# Altium PCB Main.PcbDoc (part 1 of 2)
Units mil, origin at the board's own origin, x right, y up, seen from the top; angles counter-clockwise.
Board outline 5500 x 3500 mil, 4 copper layers (Top Layer, Gnd 1, Interconnects, Gnd 2), stack 64.6 mil thick; 166 components, 135 nets, 540 pads, 1158 vias.
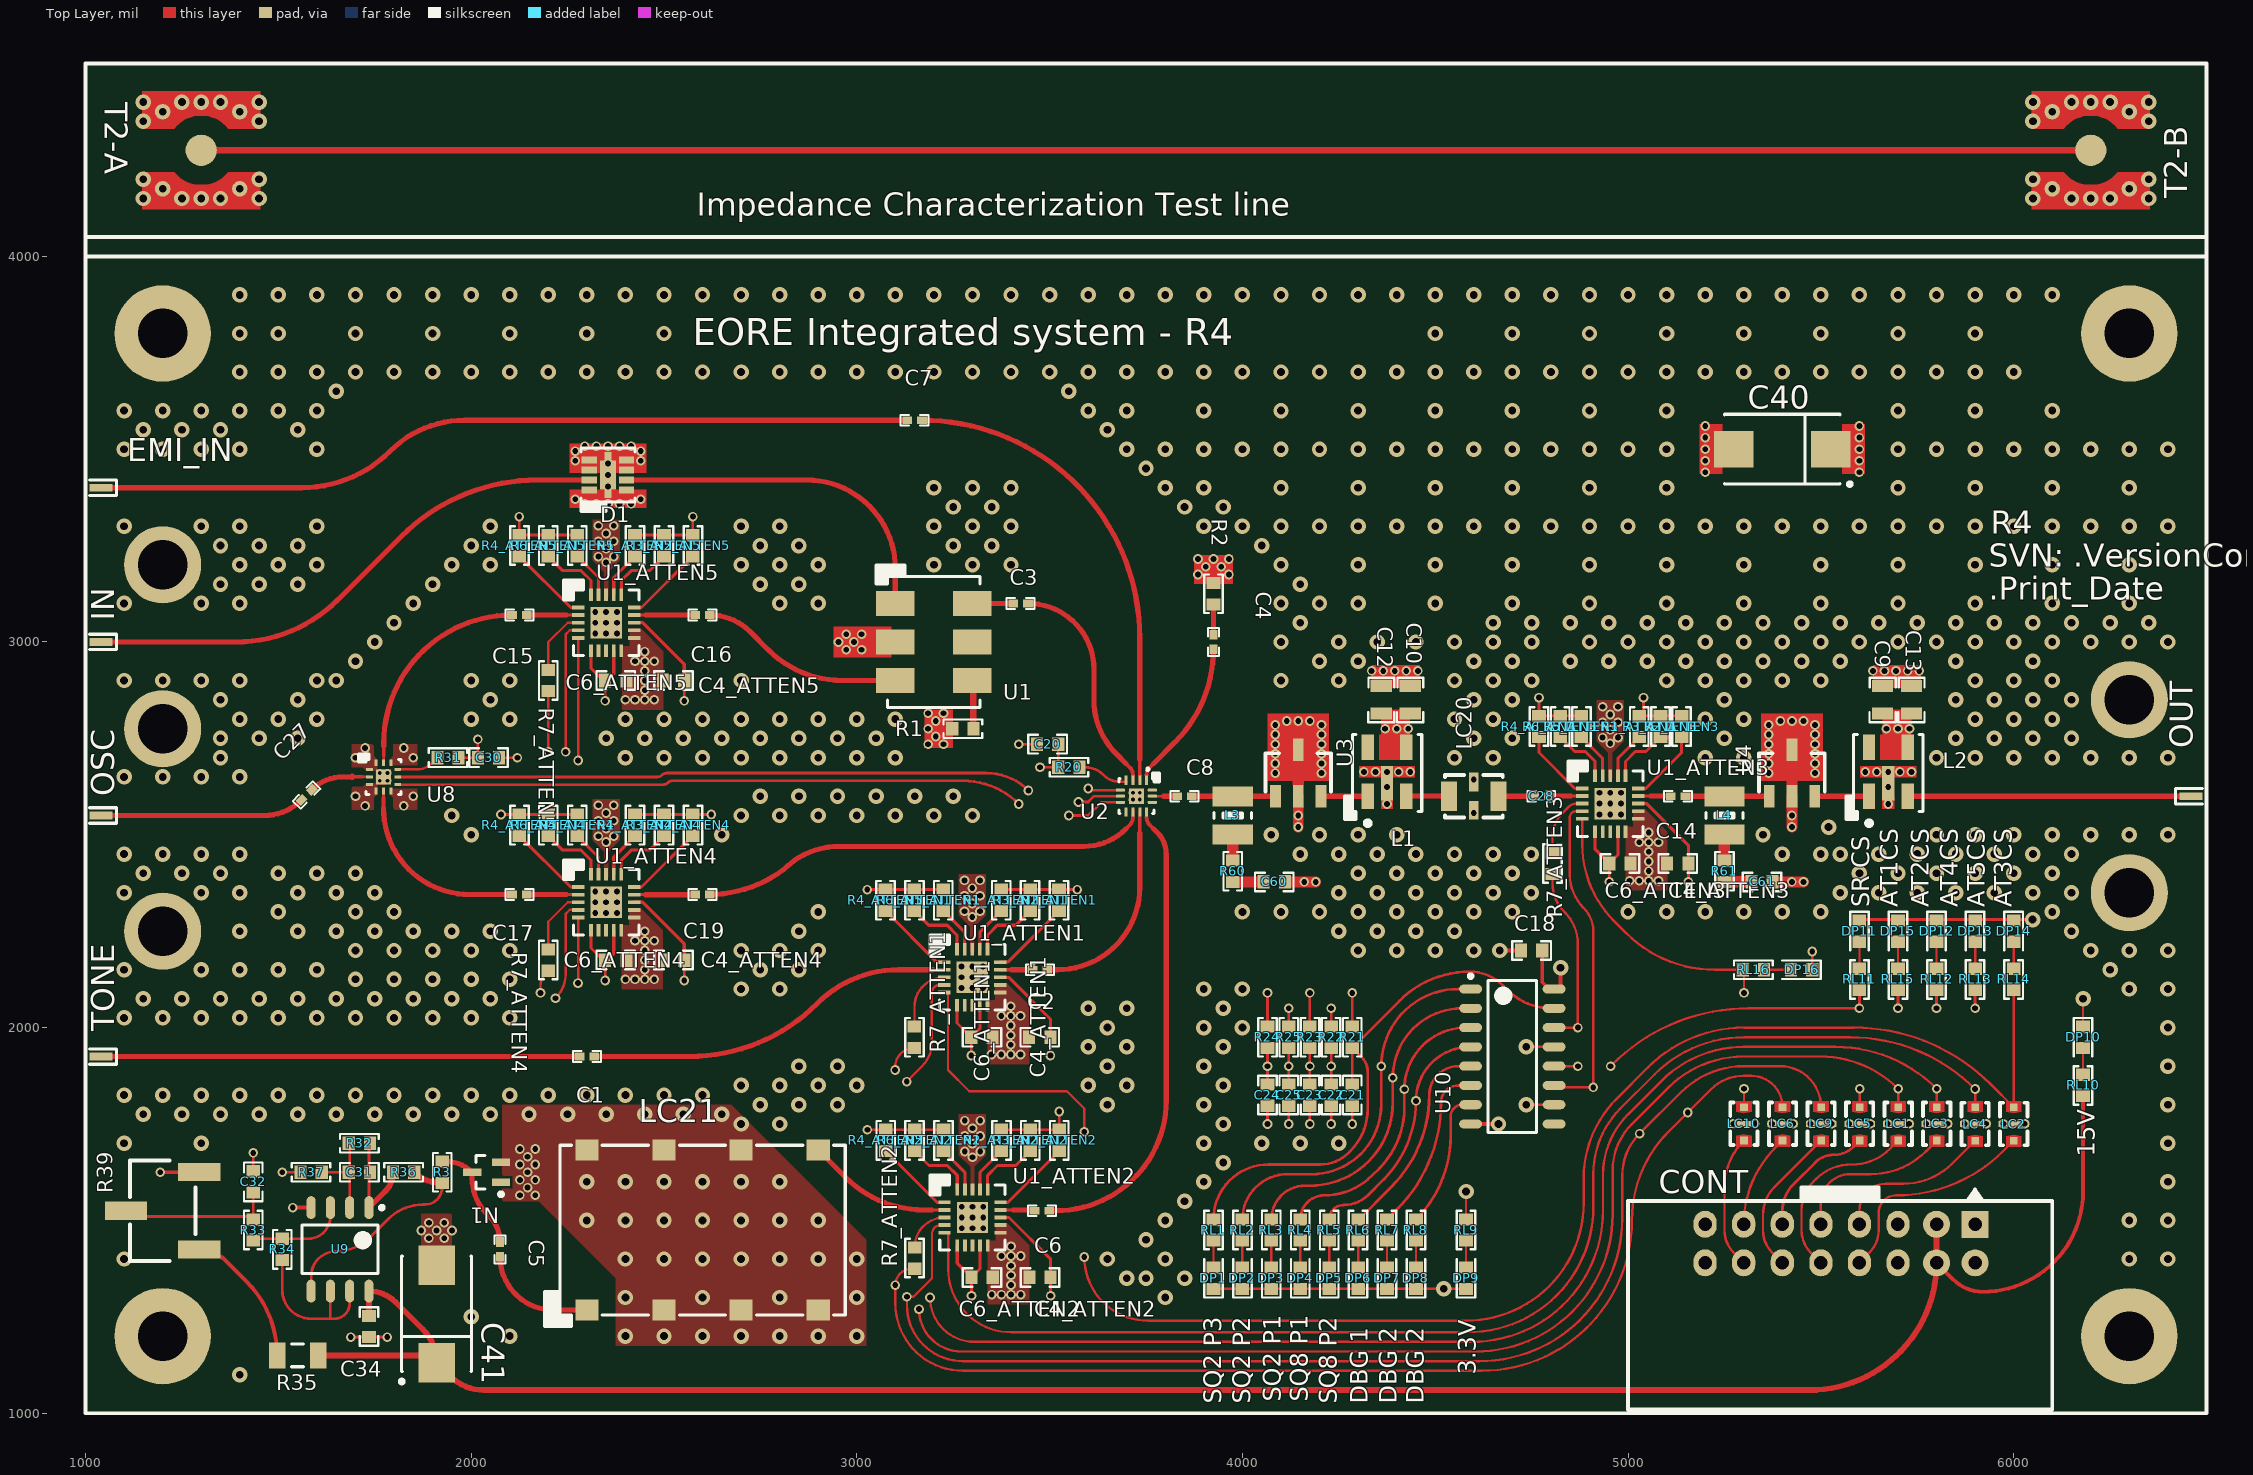
[diagram p0: Top Layer view]
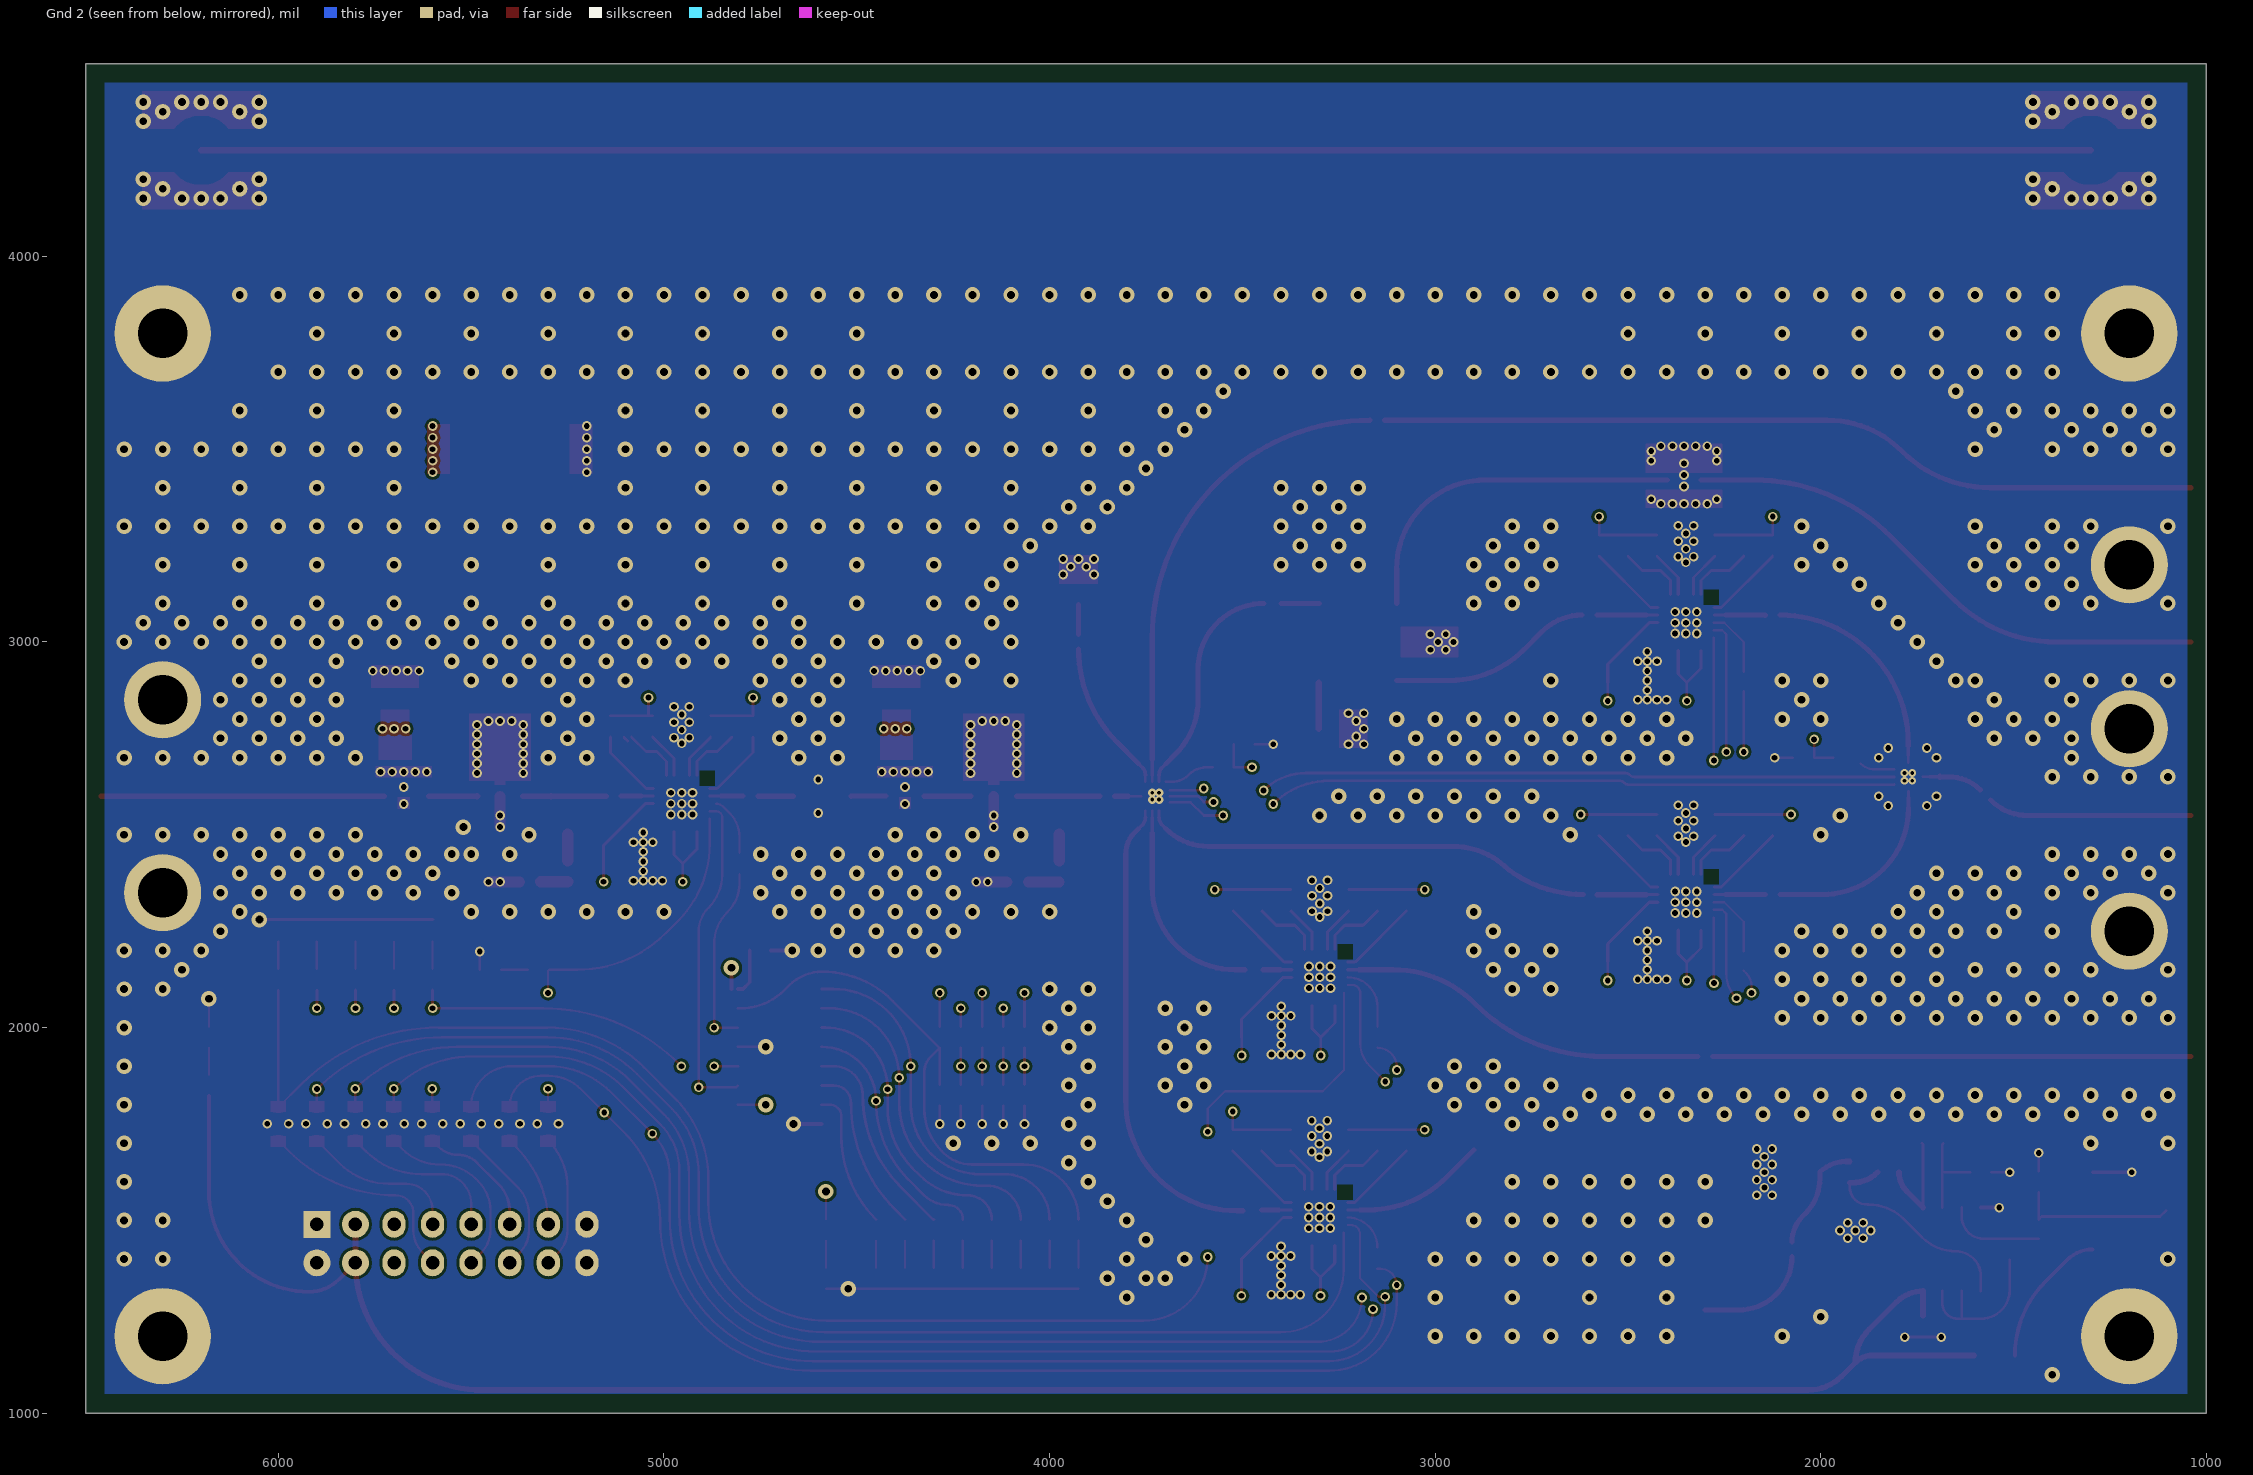
[diagram p1: Gnd 2 view, seen from below]
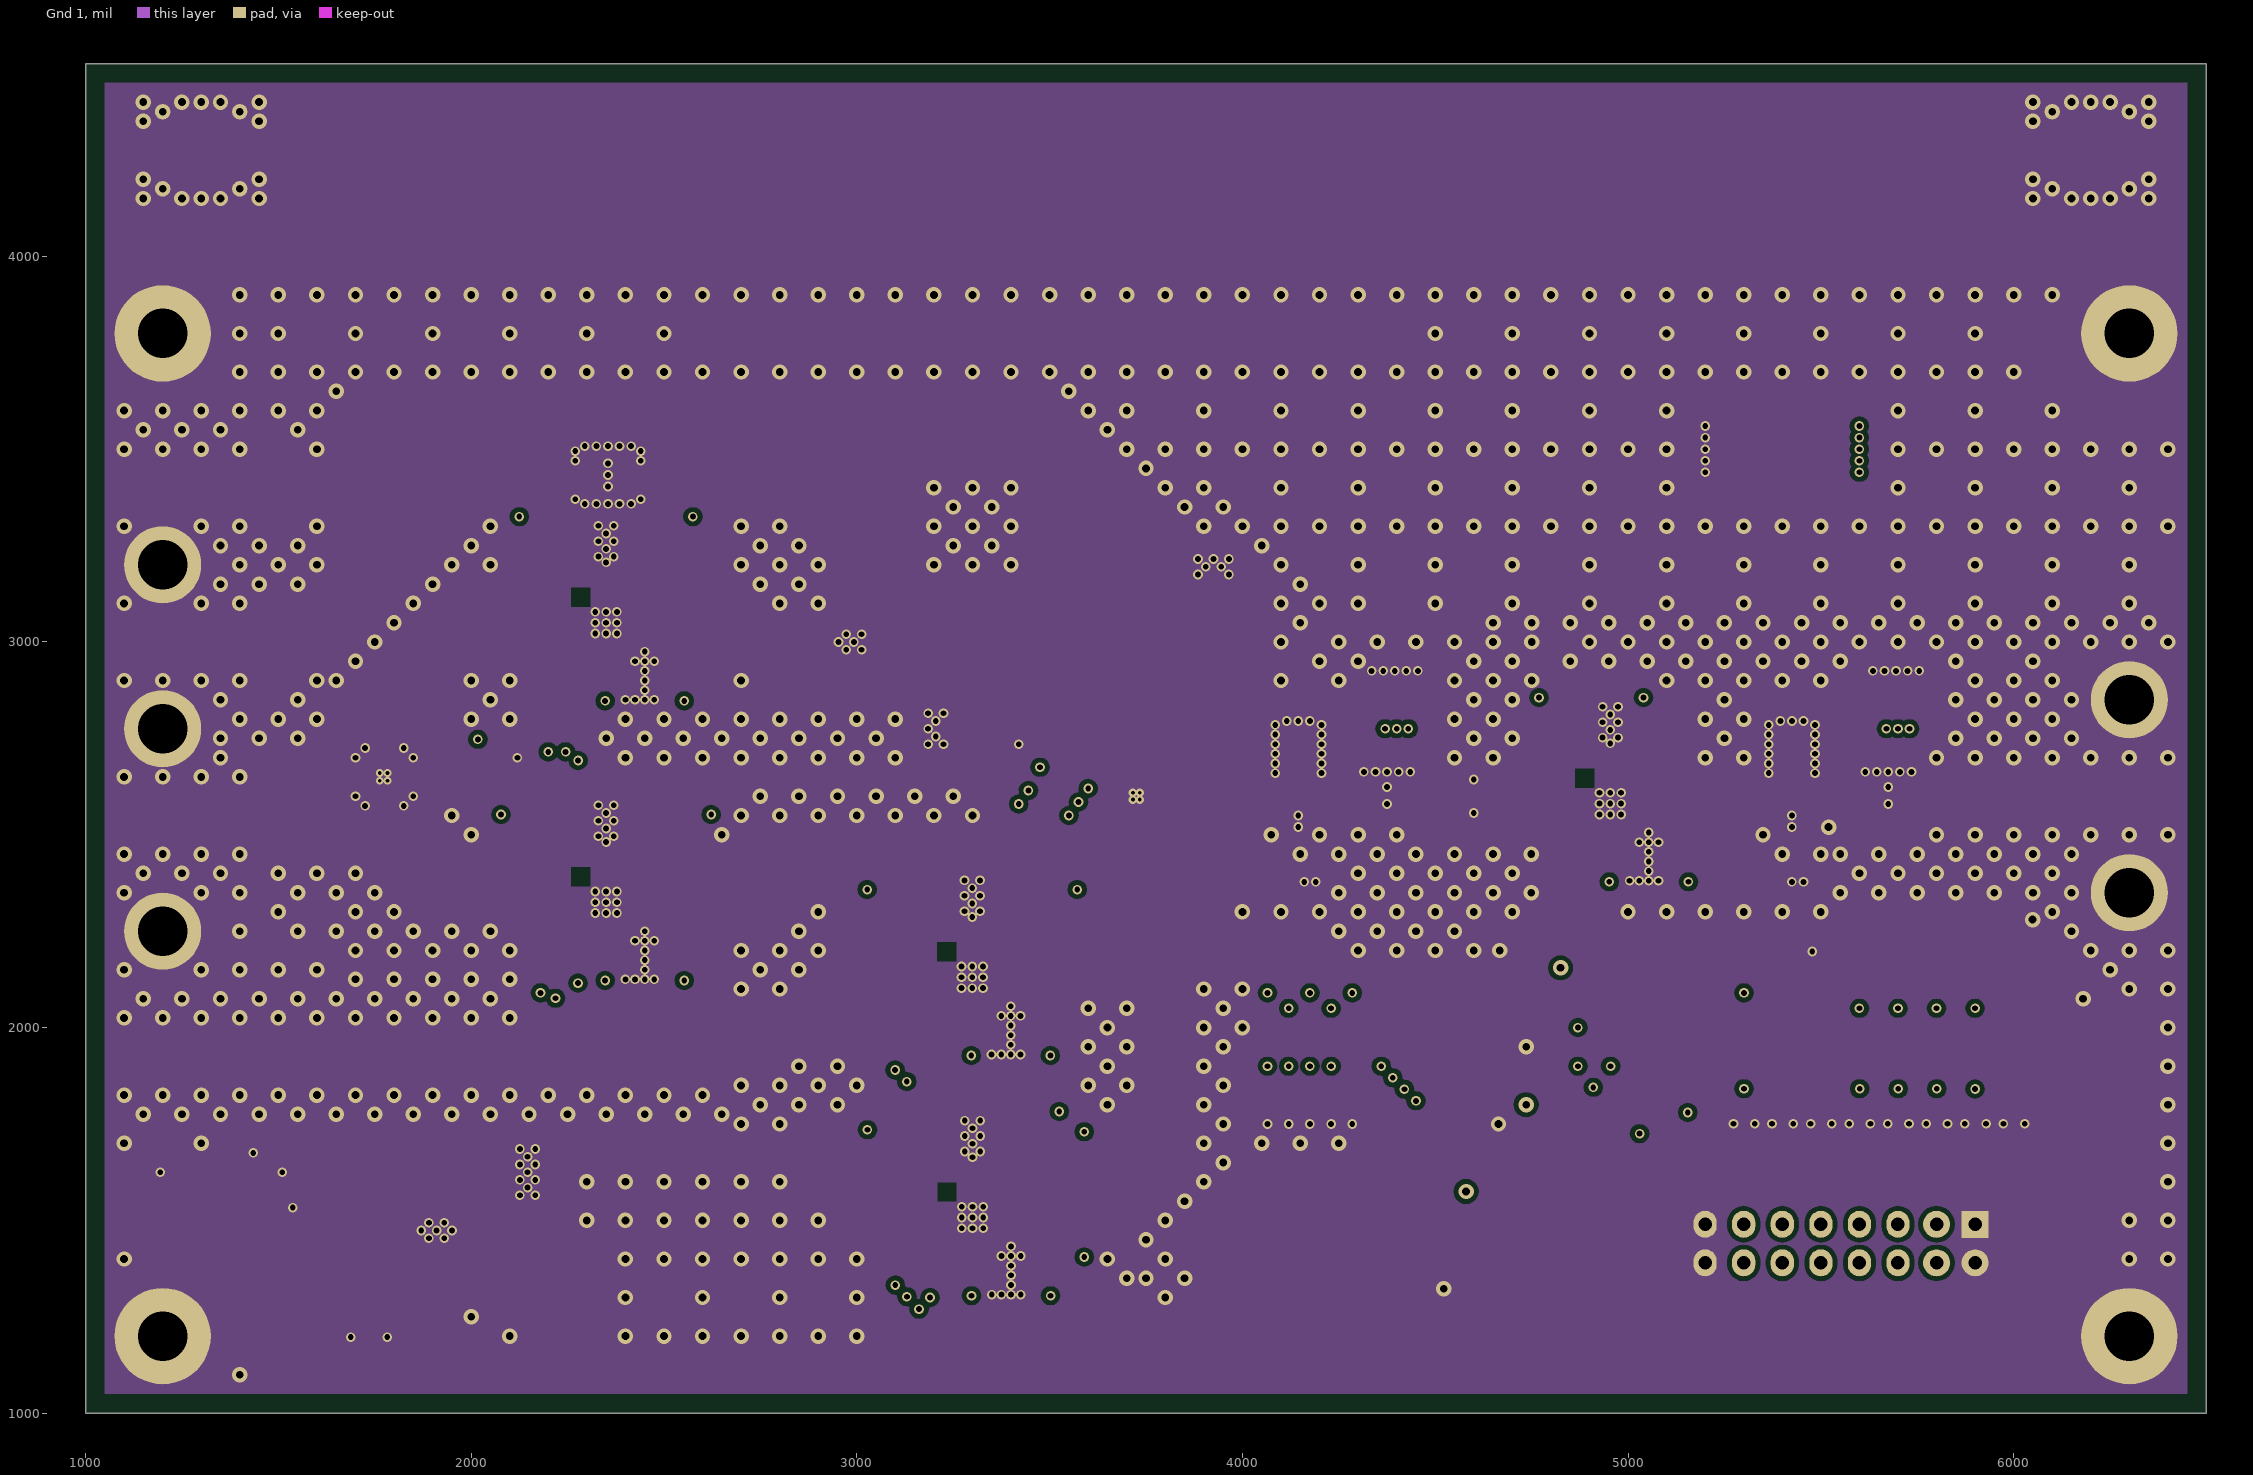
[diagram p2: Gnd 1]
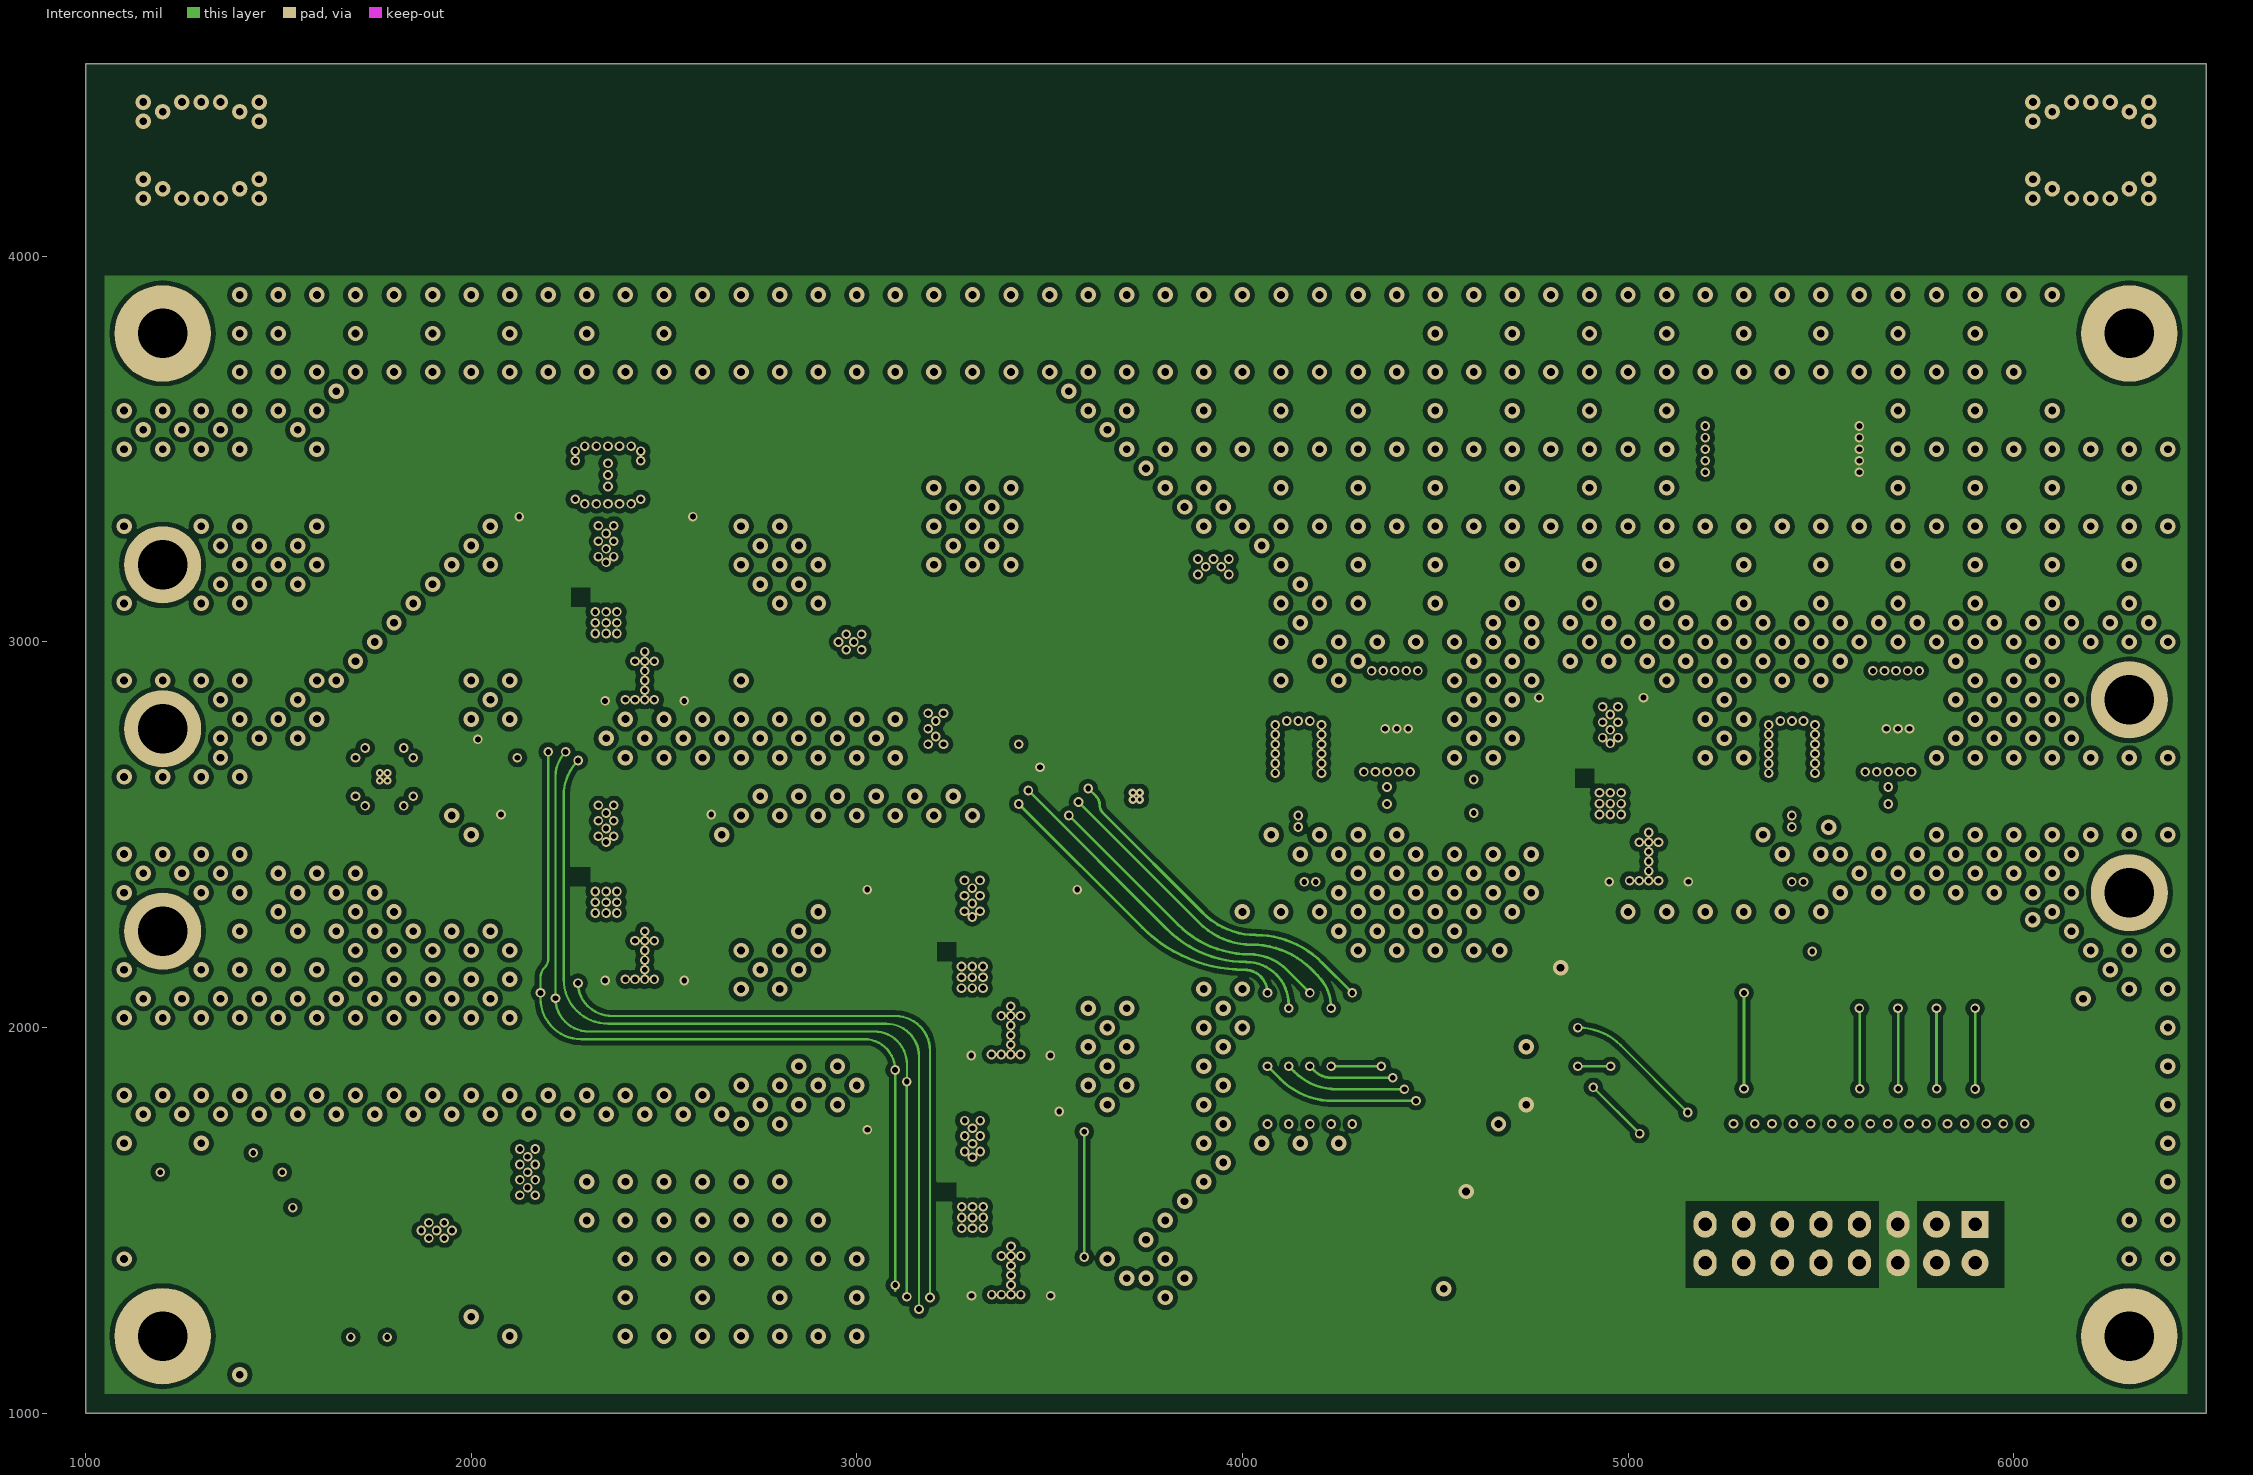
[diagram p3: Interconnects]

## Layer stack, top to bottom
Top Layer: signal copper 1.4
Dielectric: prepreg 6.7, FR-4, Dk 4.56
Gnd 1: signal copper 0.7
Dielectric: core 47, FR-4, Dk 4.8
Interconnects: signal copper 0.7
Dielectric: prepreg 6.7, FR-4, Dk 4.8
Gnd 2: signal copper 1.4

## Board outline
1000,1000 6500,1000 6500,4500 1000,4500

## Design rules (kind name [scope] priority, off if disabled: settings)
Clearance "Clearance Internal Layers" [OnLayer('GND 1') OR onLayer('Interconnects')] p1: gap=12
Clearance "Clearance Poly" [InPolygon] p2: gap=7
Clearance [All] p3: gap=6
FlightTimeFalling [All] p1: maximum=1.000n
FlightTimeRising [All] p1: maximum=1.000n
HoleSize [All] p1: absolutevalues=TRUE maxlimit=500 minlimit=10 maxpercent=80.000 minpercent=20.000
HoleSize Testpoint [All] p2 off: absolutevalues=TRUE maxlimit=100 minlimit=1 maxpercent=80.000 minpercent=20.000
HoleSize TestPointUsage [All] p3 off: absolutevalues=TRUE maxlimit=100 minlimit=1 maxpercent=80.000 minpercent=20.000
MinimumAnnularRing [All] p1: minimumring=5
MinimumSolderMaskSliver [All] p1 off: minsoldermaskwidth=10
MinimumSolderMaskSliver SilkscreenOverComponentPads [All] p2 off: minsoldermaskwidth=10
OvershootFalling [All] p1: maximum=330.0m
OvershootRising [All] p1: maximum=330.0m
ParallelSegment [All] p1 off: limit=10000 gap=10
PlaneConnect [All] p1: planeconnectstyle=Direct reliefexpansion=20 reliefentries=4 reliefconductorwidth=10 reliefairgap=10
PolygonConnect Heatsink [InNet('GND') vs InNet('GND')] p1: connectstyle=Direct reliefconductorwidth=10 reliefentries=4 polygonreliefangle="90 Angle" airgapwidth=10
PolygonConnect [All] p2: connectstyle=Direct reliefconductorwidth=10 reliefentries=4 polygonreliefangle="90 Angle" airgapwidth=10
RoomDefinition N1 [InComponentClass('N1')] p1 off: confinementstyle=ConfineIn formatcopy=TRUE lockcomponents=FALSE outline 7445,1150 9250,1150 9250,1800 7445,1800
RoomDefinition ATTEN3 [InComponentClass('ATTEN3')] p2: confinementstyle=ConfineIn formatcopy=TRUE lockcomponents=FALSE outline 4724.02,2333.84 5224.02,2333.84 5224.02,2858.84 4724.02,2858.84
RoomDefinition ATTEN5 [InComponentClass('ATTEN5')] p3 off: confinementstyle=ConfineIn formatcopy=TRUE lockcomponents=FALSE outline 10610,4790 12365,4790 12365,5110 10610,5110
RoomDefinition ATTEN4 [InComponentClass('ATTEN4')] p4 off: confinementstyle=ConfineIn formatcopy=TRUE lockcomponents=FALSE outline 10500,3990 12255,3990 12255,4310 10500,4310
RoomDefinition Main [InComponentClass('Main')] p5 off: confinementstyle=ConfineIn formatcopy=TRUE lockcomponents=FALSE outline 9940,3710 9940,1738.98 11724,1738.98 11724,3710
RoomDefinition ATTEN2 [InComponentClass('ATTEN2')] p6: confinementstyle=ConfineIn formatcopy=TRUE lockcomponents=FALSE outline 3000.02,1260.63 3598.78,1260.63 3598.78,1785.63 3000.02,1785.63
RoomDefinition ATTEN1 [InComponentClass('ATTEN1')] p7: confinementstyle=ConfineIn formatcopy=TRUE lockcomponents=FALSE outline 2999.44,1883.4 3598.2,1883.4 3598.2,2408.4 2999.44,2408.4
RoutingVias [All] p1: holewidth=15 width=30 viastyle="Through Hole" minholewidth=10 minwidth=20 maxholewidth=250 maxwidth=500
SignalStimulus [All] p1: kind=2 level=0 starttime=10.00n stoptime=60.00n periodtime=100.00n
SilkToSilkClearance [All] p1 off: silktosilkclearance=10
SilkToSolderMaskClearance [IsPad] p1 off: minsilkscreentomaskgap=10 clearancetoexposedcopper=TRUE
SolderMaskExpansion [All] p1: expansion=4
SupplyNets [All] p1: voltage=3.300
UndershootFalling [All] p1: maximum=330.0m
UndershootRising [All] p1: maximum=330.0m
Width Width_General [All] p1: maxlimit=250 minlimit=6 preferedwidth=10
Width "Width Differential Pair" [(InDifferentialPairClass('All Differential Pairs'))] p2: maxlimit=26.05 minlimit=1.49 preferedwidth=18.35 toplayer_maxwidth=4.34 toplayer_prefwidth=2.69 midlayer1_minwidth=3.62 midlayer1_maxwidth=7.77 midlayer1_prefwidth=5.4 midlayer2_minwidth=9.66 midlayer2_maxwidth=20.06 midlayer2_prefwidth=14.02 bottomlayer_minwidth=12.79 impedancedriven=TRUE minimp=80.000000 maximp=100.000000 favimp=90.000000
23 further rules are at their usual default settings.

## Classes and differential pairs
component class ATTEN5: C4_ATTEN5 C6_ATTEN5 R1_ATTEN5 R2_ATTEN5 R3_ATTEN5 R4_ATTEN5 R5_ATTEN5 R6_ATTEN5 R7_ATTEN5 U1_ATTEN5
component class ATTEN4: C4_ATTEN4 C6_ATTEN4 R1_ATTEN4 R2_ATTEN4 R3_ATTEN4 R4_ATTEN4 R5_ATTEN4 R6_ATTEN4 R7_ATTEN4 U1_ATTEN4
component class Main: C1 C2 C3 C4 C5 C6 C7 C8 C9 C10 C12 C13 C14 C15 C16 C17 C18 C19 C20 C21 C22 C23 C24 C25 C27 C28 C30 C40 C41 C60 C61 CONT D1 DP1 DP2 DP3 DP4 DP5 DP6 DP7 DP8 DP9 DP10 DP11 DP12 DP13 DP14 DP15 DP16 EMI_IN IN L1 L2 L3 L4 LC1 LC2 LC3 LC4 LC5 LC6 LC9 LC10 LC20 LC21 OSC OUT R1 R2 R20 R21 R22 R23 R24 R25 R31 R60 R61 RL1 RL2 RL3 RL4 RL5 RL6 RL7 RL8 RL9 RL10 RL11 RL12 RL13 RL14 RL15 RL16 T2-A T2-B TONE U1 U2 U3 U4 U8 U10
component class ATTEN1: C4_ATTEN1 C6_ATTEN1 R1_ATTEN1 R2_ATTEN1 R3_ATTEN1 R4_ATTEN1 R5_ATTEN1 R6_ATTEN1 R7_ATTEN1 U1_ATTEN1
component class ATTEN2: C4_ATTEN2 C6_ATTEN2 R1_ATTEN2 R2_ATTEN2 R3_ATTEN2 R4_ATTEN2 R5_ATTEN2 R6_ATTEN2 R7_ATTEN2 U1_ATTEN2
component class ATTEN3: C4_ATTEN3 C6_ATTEN3 R1_ATTEN3 R2_ATTEN3 R3_ATTEN3 R4_ATTEN3 R5_ATTEN3 R6_ATTEN3 R7_ATTEN3 U1_ATTEN3
channel class Attenuator: ATTEN1 ATTEN2 ATTEN3
component class N1: C31 C32 C34 N1 R3 R32 R33 R34 R35 R36 R37 R39 U9

## Components (designator, comment, footprint, x,y, rotation, side; value= is the part's Value field where it differs from the comment)
C1 "Cap" 0402C 2300,1925 r0 top
C2 "Cap" 0402C 3475,2150 r0 top
C3 "Cap" 0402C 3425,3100 r0 top
C4 "Cap" 0402C 3925,3000 r270 top
C4_ATTEN1 "SMT Cap" 0603C 3474.44,1975 r0 top (schematic designator C4)
C4_ATTEN2 "SMT Cap" 0603C 3475.02,1352.23 r0 top (schematic designator C4)
C4_ATTEN3 "SMT Cap" 0603C 5129.02,2425.44 r0 top (schematic designator C4)
C4_ATTEN4 "SMT Cap" 0603C 2525,2175 r0 top (schematic designator C4)
C4_ATTEN5 "SMT Cap" 0603C 2525,2900 r0 top (schematic designator C4)
C5 "Cap" 0402C 2075,1425 r270 top
C6 "Cap" 0402C 3480,1525 r0 top
C6_ATTEN1 "SMT Cap" 0603C 3324.44,1975 r180 top (schematic designator C6)
C6_ATTEN2 "SMT Cap" 0603C 3325.02,1352.23 r180 top (schematic designator C6)
C6_ATTEN3 "SMT Cap" 0603C 4979.02,2425.44 r180 top (schematic designator C6)
C6_ATTEN4 "SMT Cap" 0603C 2375,2175 r180 top (schematic designator C6)
C6_ATTEN5 "SMT Cap" 0603C 2375,2900 r180 top (schematic designator C6)
C7 "Cap" 0402C 3150,3575 r0 top
C8 "Cap" 0402C 3850,2600 r0 top
C9 "Cap" 0805C 5660,2850 r270 top
C10 "Cap" 0805C 4435,2850 r270 top
C12 "Cap" 0805C 4360,2850 r270 top
C13 "Cap" 0805C 5735,2850 r270 top
C14 "Cap" 0402C 5130,2600 r0 top
C15 "Cap" 0402C 2125,3070 r0 top
C16 "Cap" 0402C 2600,3070 r0 top
C17 "Cap" 0402C 2125,2345 r0 top
C18 "Cap" 0603C 4750,2200 r0 top
C19 "Cap" 0402C 2600,2345 r0 top
C20 "SMT Cap" 0603C 3495,2735 r0 top
C21 "SMT Cap" 0603C 4285,1825 r90 top
C22 "SMT Cap" 0603C 4230,1825 r90 top
C23 "SMT Cap" 0603C 4175,1825 r90 top
C24 "SMT Cap" 0603C 4065,1825 r90 top
C25 "SMT Cap" 0603C 4120,1825 r90 top
C27 "Cap" 0402C 1573.28,2603.28 r45 top
C28 "Cap" 0402C 4775,2600 r0 top
C30 "SMT Cap" 0603C 2045,2700 r180 top
C31 "Cap" 0603C 1710,1625 r0 top
C32 "Cap" 0603C 1435,1600 r270 top
C34 "Cap" 0603C 1735,1225 r90 top
C40 "SMT Cap" V 5400,3500 r180 top
C41 "SMT Cap" V 1910.44,1257.45 r90 top
C60 "SMT Cap" 0603C 4082.56,2377.8 r0 top
C61 "SMT Cap" 0603C 5347.44,2377.8 r0 top
CONT "Header 8X2" 5103310-3 5300,1450 r0 top
D1 "CLM-83-2W" DL1721 2354.71,3432.99 r0 top
DP1 "LED0" "0603 SMT LED" 3925,1350 r90 top
DP2 "LED0" "0603 SMT LED" 4000,1350 r90 top
DP3 "LED0" "0603 SMT LED" 4075,1350 r90 top
DP4 "LED0" "0603 SMT LED" 4150,1350 r90 top
DP5 "LED0" "0603 SMT LED" 4225,1350 r90 top
DP6 "LED0" "0603 SMT LED" 4300,1350 r90 top
DP7 "LED0" "0603 SMT LED" 4375,1350 r90 top
DP8 "LED0" "0603 SMT LED" 4450,1350 r90 top
DP9 "LED0" "0603 SMT LED" 4580,1350 r90 top
DP10 "LED0" "0603 SMT LED" 6180,1975 r270 top
DP11 "LED0" "0603 SMT LED" 5600,2250 r270 top
DP12 "LED0" "0603 SMT LED" 5800,2250 r270 top
DP13 "LED0" "0603 SMT LED" 5900,2250 r270 top
DP14 "LED0" "0603 SMT LED" 6000,2250 r270 top
DP15 "LED0" "0603 SMT LED" 5700,2250 r270 top
DP16 "LED0" "0603 SMT LED" 5450,2150 r180 top
EMI_IN "SMA-Bulkhead" 1052902-1 1040,3400 r0 top
IN "SMA-Bulkhead" 1052902-1 1040,3000 r0 top
L1 "TCBT-14" GU1414 4375,2600 r0 top
L2 "TCBT-14" GU1414 5675,2600 r0 top
L3 "620 nH" 1008L 3975,2550 r270 top
L4 "620 nH" 1008L 5250,2550 r270 top
LC1 "MEM2012F" "MEM2012S LC Filter" 5700.63,1750.55 r270 top
LC2 "MEM2012F" "MEM2012S LC Filter" 6000,1750 r270 top
LC3 "MEM2012F" "MEM2012S LC Filter" 5800.63,1750.55 r270 top
LC4 "MEM2012F" "MEM2012S LC Filter" 5900,1750 r270 top
LC5 "MEM2012F" "MEM2012S LC Filter" 5600.63,1750.55 r270 top
LC6 "MEM2012F" "MEM2012S LC Filter" 5400.63,1750.55 r270 top
LC9 "MEM2012F" "MEM2012S LC Filter" 5500.63,1750.55 r270 top
LC10 "MEM2012F" "MEM2012S LC Filter" 5300.63,1750.55 r270 top
LC20 "LFCN-400" FV1206 4600,2600 r0 top
LC21 "SXHP-48" HF1139 2300,1475 r0 top
N1 "NC303SOT" SOT323-3AN 2040,1625 r180 top
OSC "SMA-Bulkhead" 1052902-1 1040,2550 r0 top
OUT "SMA-Bulkhead" 1052902-1 6460,2600 r180 top
R1 "FC0603-50BFCT-ND" 0603R 3275,2775 r0 top
R1_ATTEN1 "RES Semi" 0603R 3374.43,2330.33 r90 top (schematic designator R1)
R1_ATTEN2 "RES Semi" 0603R 3375,1707.56 r90 top (schematic designator R1)
R1_ATTEN3 "RES Semi" 0603R 5029,2780.77 r90 top (schematic designator R1)
R1_ATTEN4 "RES Semi" 0603R 2425,2525 r90 top (schematic designator R1)
R1_ATTEN5 "RES Semi" 0603R 2425,3250 r90 top (schematic designator R1)
R2 "FC0603-50BFCT-ND" 0603R 3925,3125 r270 top
R2_ATTEN1 "RES Semi" 0603R 3524.43,2330.33 r90 top (schematic designator R2)
R2_ATTEN2 "RES Semi" 0603R 3525,1707.56 r90 top (schematic designator R2)
R2_ATTEN3 "RES Semi" 0603R 5139,2780.77 r90 top (schematic designator R2)
R2_ATTEN4 "RES Semi" 0603R 2575,2525 r90 top (schematic designator R2)
R2_ATTEN5 "RES Semi" 0603R 2575,3250 r90 top (schematic designator R2)
R3 "Res Semi Small" 0603R 1925,1625 r270 top
R3_ATTEN1 "RES Semi" 0603R 3449.43,2330.33 r90 top (schematic designator R3)
R3_ATTEN2 "RES Semi" 0603R 3450,1707.56 r90 top (schematic designator R3)
R3_ATTEN3 "RES Semi" 0603R 5084,2780.77 r90 top (schematic designator R3)
R3_ATTEN4 "RES Semi" 0603R 2500,2525 r90 top (schematic designator R3)
R3_ATTEN5 "RES Semi" 0603R 2500,3250 r90 top (schematic designator R3)
R4_ATTEN1 "RES Semi" 0603R 3074.43,2330.33 r90 top (schematic designator R4)
R4_ATTEN2 "RES Semi" 0603R 3075,1707.56 r90 top (schematic designator R4)
R4_ATTEN3 "RES Semi" 0603R 4769,2780.77 r90 top (schematic designator R4)
R4_ATTEN4 "RES Semi" 0603R 2125,2525 r90 top (schematic designator R4)
R4_ATTEN5 "RES Semi" 0603R 2125,3250 r90 top (schematic designator R4)
R5_ATTEN1 "RES Semi" 0603R 3224.43,2330.33 r90 top (schematic designator R5)
R5_ATTEN2 "RES Semi" 0603R 3225,1707.56 r90 top (schematic designator R5)
R5_ATTEN3 "RES Semi" 0603R 4879,2780.77 r90 top (schematic designator R5)
R5_ATTEN4 "RES Semi" 0603R 2275,2525 r90 top (schematic designator R5)
R5_ATTEN5 "RES Semi" 0603R 2275,3250 r90 top (schematic designator R5)
R6_ATTEN1 "RES Semi" 0603R 3149.43,2330.33 r90 top (schematic designator R6)
R6_ATTEN2 "RES Semi" 0603R 3150,1707.56 r90 top (schematic designator R6)
R6_ATTEN3 "RES Semi" 0603R 4824,2780.77 r90 top (schematic designator R6)
R6_ATTEN4 "RES Semi" 0603R 2200,2525 r90 top (schematic designator R6)
R6_ATTEN5 "RES Semi" 0603R 2200,3250 r90 top (schematic designator R6)
R7_ATTEN1 "RES Semi" 0603R 3149.44,1975 r270 top (schematic designator R7)
R7_ATTEN2 "RES Semi" 0603R 3150.02,1402.23 r270 top (schematic designator R7)
R7_ATTEN3 "RES Semi" 0603R 4804.02,2425.44 r270 top (schematic designator R7)
R7_ATTEN4 "RES Semi" 0603R 2200,2175 r270 top (schematic designator R7)
R7_ATTEN5 "RES Semi" 0603R 2200,2900 r270 top (schematic designator R7)
R20 "RES Semi" 0603R 3550,2675 r180 top
R21 "RES Semi" 0603R 4285,1975 r270 top
R22 "RES Semi" 0603R 4230,1975 r270 top
R23 "RES Semi" 0603R 4175,1975 r270 top
R24 "RES Semi" 0603R 4065,1975 r90 top
R25 "RES Semi" 0603R 4120,1975 r90 top
R31 "RES Semi" 0603R 1940,2700 r0 top
R32 "Res Semi" 0603R 1710,1700 r0 top
R33 "Res Semi" 0603R 1435,1475 r270 top
R34 "Res Semi" 0603R 1510,1425 r270 top
R35 "Res Semi" 1206R 1550,1150 r0 top
R36 "Res2" 0603R 1825,1625 r180 top
R37 "Res Semi" 0603R 1585,1625 r0 top
R39 "2.5K" "Bourns 3269W - 12 Turn SMT Trimpot" 1200,1525 r180 top
R60 "Res Semi Small" 0603R 3975,2405.35 r270 top
R61 "Res Semi Small" 0603R 5250,2405.35 r270 top
RL1 "Res Semi Small" 0603R 3925,1475 r270 top
RL2 "Res Semi Small" 0603R 4000,1475 r270 top
RL3 "Res Semi Small" 0603R 4075,1475 r270 top
RL4 "Res Semi Small" 0603R 4150,1475 r270 top
RL5 "Res Semi Small" 0603R 4225,1475 r270 top
RL6 "Res Semi Small" 0603R 4300,1475 r270 top
RL7 "Res Semi Small" 0603R 4375,1475 r270 top
RL8 "Res Semi Small" 0603R 4450,1475 r270 top
RL9 "Res Semi Small" 0603R 4580,1475 r270 top
RL10 "Res Semi Small" 0603R 6180,1850 r90 top
RL11 "Res Semi Small" 0603R 5600,2125 r90 top
RL12 "Res Semi Small" 0603R 5800,2125 r90 top
RL13 "Res Semi Small" 0603R 5900,2125 r90 top
RL14 "Res Semi Small" 0603R 6000,2125 r90 top
RL15 "Res Semi Small" 0603R 5700,2125 r90 top
RL16 "Res Semi Small" 0603R 5325,2150 r0 top
T2-A "COAX-M" "SMT RA SMA Connector" 1300,4275 r90 top
T2-B "COAX-M" "SMT RA SMA Connector" 6200,4275 r90 top
TONE "SMA-Bulkhead" 1052902-1 1040,1925 r0 top
U1 "ADC-10-4" CD542 3200,3000 r270 top
U1_ATTEN1 "DAT-31R5-SP" QFN50P400X400X90_HS-21N 3299.43,2130.33 r0 top (schematic designator U1)
U1_ATTEN2 "DAT-31R5-SP" QFN50P400X400X90_HS-21N 3300,1507.56 r0 top (schematic designator U1)
U1_ATTEN3 "DAT-31R5-SP" QFN50P400X400X90_HS-21N 4954,2580.77 r0 top (schematic designator U1)
U1_ATTEN4 "DAT-31R5-SP" QFN50P400X400X90_HS-21N 2350,2325 r0 top (schematic designator U1)
U1_ATTEN5 "DAT-31R5-SP" QFN50P400X400X90_HS-21N 2350,3050 r0 top (schematic designator U1)
U2 "SP6T RF Switch" MT1817 3725,2600 r270 top
U3 "PGA-103+" DF782 4145,2600 r0 top
U4 "PGA-103+" DF782 5425,2600 r0 top
U8 "JSW2-63DR" MT1818 1773,2650 r0 top
U9 "LM7332" SOIC127P600-8CN 1660,1425 r270 top
U10 "SN74LS595N" SOIC127P602-16BN 4700,1925 r0 top

## Footprints (in the part's own frame and the unit in brackets; to place one, negate y for a bottom-side part, rotate by r counter-clockwise, add the part's x,y. Pads: shape width x height; smd on the part's side, far side on the other; paste and mask are expansions set on the pad)
0402C [mil]
  rect 25x20 smd: 1(-19.02,0) 2(19.02,0)
  silkscreen extent -36,-14 36,14, body extent -36,-14 36,14
"0603 SMT LED" [mm]
  rect 0.8x0.9 smd: 1(0.7,0) 2(-0.7,0)
  silkscreen extent -1.27,-0.61 1.27,0.61, body extent -0.87,-0.48 0.87,0.48, height 1.3
0603C [mm] "0603 Size Capacitor"
  rect 0.8x0.9 smd: 1(-0.7,0) 2(0.7,0)
  silkscreen extent -1.27,-0.61 1.27,0.61, body extent -0.87,-0.48 0.87,0.48, height 1.3
0603R [mm]
  rect 0.8x0.9 smd: 1(-0.7,0) 2(0.7,0)
  silkscreen extent -1.27,-0.61 1.27,0.61, body extent -0.87,-0.48 0.87,0.48, height 1.3
0805C [mm]
  rect 0.8x1.4 smd: 1(-0.9,0) 2(0.9,0)
  silkscreen extent -1.45,-0.86 1.47,0.86, body extent -1.1,-0.72 1.1,0.72, height 1.4
1008L [mm] "1008 SMT Inductor"
  rect 1.32x2.65 smd: 1(-1.245,0) 2(1.245,0)
  silkscreen extent -0.2,-1.22 0.2,1.23, body extent -1.45,-1.32 1.45,1.33, height 1.9
1206R [mm] "1206 Chip Resistor"
  rect 1.1x1.7 smd: 1(-1.35,0) 2(1.35,0)
  silkscreen extent -0.4,-0.75 0.4,0.75, body extent -1.7,-0.9 1.7,0.9, height 1.3
1052902-1 [mil] "Bulkhead SMA Connector (TE: 1052902-1)"
  rect 60x20 smd: 1(0,0)
  silkscreen extent -30,-20 40,20
5103310-3 [mil] "16 Pin Rectangular connector, right-angle"
  rect 70x70 hole 35: 1(600,40)
  round 70 hole 35: 2(600,-60) 3(500,40) 4(500,-60)
  oval 60x70 hole 35: 5(400,40) 6(400,-60) 7(300,40) 8(300,-60) 9(200,40) 10(200,-60) 11(100,40) 12(100,-60) 13(0,40) 14(0,-60) 15(-100,40) 16(-100,-60)
  silkscreen extent -300,-440 800,135, body extent -300,-440 800,50, height 380
"Bourns 3269W - 12 Turn SMT Trimpot" [mm]
  rect 2.79x1.19 smd: 1(-2.413,2.54) 2(2.413,0) 3(-2.413,-2.54)
  silkscreen extent -2.16,-3.3 2.16,3.3, body extent -2.16,-3.3 2.16,3.3, height 8.38
CD542 [mm] "Mini-Circuits CD542 Package"
  rect 1.65x2.54 smd paste-0.1: 1(-2.54,-2.54) 2(0,-2.54) 3(2.54,-2.54) 4(2.54,2.54) 5(0,2.54) 6(-2.54,2.54)
  silkscreen extent -5.08,-3.81 4.32,3.05, body extent -3.94,-2.79 3.94,2.79, height 3
DF782 [mil] "Mini-Circuits DF782 Package"
  rect 28x59 smd: 1(-59,0) 2(0,0) 3(59,0) 4(0,120.5)
  Top Layer region: -14,42.5 -37,65.5 -37,161.5 -18,180.5 18,180.5 37,161.5 37,65.5 14,42.5 14,29.5 -14,29.5
  silkscreen extent -85,12 85,112, body extent -85,12 85,112, height 63
DL1721 [mm] "DL1721 Mini-Circuits Device Pachage"
  rect 1x0.46 smd paste-0.1: 1(-1.23,-0.99) 2(-1.23,-0.33) 3(-1.23,0.33) 4(-1.23,0.99) 5(1.23,0.99) 6(1.23,0.33) 7(1.23,-0.33) 8(1.23,-0.99)
  rect 1.04x1.91 smd paste-0.1: 9(0,0)
  rect 0.46x3 smd paste-0.1: 10(0,0)
  silkscreen extent -1.78,-2.41 1.78,1.78, body extent -1.5,-1.5 1.5,1.5, height 1.14
FV1206 [mil] "Mini-Circuits LTCC SMT Chip-Filter"
  rect 41x77 smd: 1(-64,0) 3(64,0)
  rect 24x49 smd: 2(0,-36.5) 4(0,36.5)
  silkscreen extent -75,-55 75,55
GU1414 [mil] "Mini-Circuits GU1414 Case"
  rect 32x66 smd paste-3.94: 1(-50,0) 2(50,0) 3(50,127) 4(-50,127)
  rect 32x90 smd paste-3.94: 5(0,34)
  Top Layer region: -21,94 65,94 65,160 -21,160
  Top Layer region: -73,48 73,48 73,79 -73,79
  Top Layer region: -16,-33 16,-33 16,-2 -16,-2
  silkscreen extent -110,-75 90,160, body extent -75,-25 75,150, height 150
HF1139 [mil] "Mini-Circuits HF1139 package"
  rect 60x55 smd: 1(0,-207.5) 2(0,207.5) 3(200,-207.5) 4(200,207.5) 5(400,-207.5) 6(400,207.5) 7(600,-207.5) 8(600,207.5)
  silkscreen extent -110,-250 670,220, body extent -70,-220 670,220, height 270
"MEM2012S LC Filter" [mm] "MEM2012S TDK LC Filter"
  rect 0.5x0.5 smd: 1(-1.1,0) 3(1.1,0)
  rect 0.4x2 smd: 2(0,0)
  Top Layer region: 1.5,0.5 1.5,-0.5 0.8,-0.5 0.7,0 0.8,0.5
  Top Layer region: -1.5,-0.5 -1.5,0.5 -0.8,0.5 -0.7,0 -0.8,-0.5
  silkscreen extent -1.4,-0.9 1.4,0.9, body extent -1.4,-0.7 1.4,0.7, height 0.85
MT1817 [mm] "Mini-Circuits MT1817 Package"
  rect 0.6x0.2 smd: 1(-1.05,0.675) 2(-1.05,0.225) 3(-1.05,-0.225) 4(-1.05,-0.675) 8(1.05,-0.675) 9(1.05,-0.225) 10(1.05,0.225) 11(1.05,0.675)
  rrect50% 0.2x0.6 smd: 5(-0.4,-1.05) 6(0,-1.05) 7(0.4,-1.05) 12(0.4,1.05) 13(0,1.05) 14(-0.4,1.05)
  rect 1x1 smd: 15(0,0)
  silkscreen extent -1.83,-1.15 1.15,1.52, body extent -1,-1 1,1, height 0.55
MT1818 [mm] "QFN, 12-Leads, Body 2.00x2.00mm, Pitch 0.50mm, Thermal Pad 0.76x0.76mm, IPC Medium Density"
  rect 0.44x0.2 smd mask+0.05: 1(-0.925,0.5) 2(-0.925,0) 3(-0.925,-0.5)
  rect 0.2x0.44 smd mask+0.05: 4(-0.5,-0.925) 5(0,-0.925) 6(0.5,-0.925) 10(0.5,0.925) 11(0,0.925) 12(-0.5,0.925)
  rrect50% 0.44x0.2 smd mask+0.05: 7(0.925,-0.5) 8(0.925,0) 9(0.925,0.5)
  rect 1x1 smd mask-0.12: 13(0,0)
  silkscreen extent -1.7,-1.15 1.15,1.52
QFN50P400X400X90_HS-21N [mm] "QFN, 20-Leads, Body 4.00x4.00mm, Pitch 0.50mm, Thermal Pad 2.06x2.06mm, IPC Medium Density"
  rect 0.635x0.635 on Keep-Out paste-0.1: 0(-1.676,1.676)
  rect 0.81x0.25 smd: 1(-1.845,1) 2(-1.845,0.5) 3(-1.845,0) 4(-1.845,-0.5) 5(-1.845,-1) 11(1.845,-1) 12(1.845,-0.5) 13(1.845,0) 14(1.845,0.5) 15(1.845,1)
  rect 0.25x0.81 smd: 6(-1,-1.845) 7(-0.5,-1.845) 8(0,-1.845) 9(0.5,-1.845) 10(1,-1.845) 16(1,1.845) 17(0.5,1.845) 18(0,1.845) 19(-0.5,1.845) 20(-1,1.845)
  rect 2.06x2.06 smd: 21(0,0)
  silkscreen extent -2.79,-2.15 2.15,2.79, body extent -2,-2 2,2, height 0.9
"SMT RA SMA Connector" [mil] "CONSMA002-SMD"
  round 81 smd paste-3.94: 1(0,0)
  round 40 hole 20 paste-3.94: 2(100,100) 3(100,-100) 4(-100,-100) 5(-100,100)
  Top Layer region: 56.5,-70.06 81.19,-38.83 90,0 81.19,38.83 56.5,70.06 56.5,70.06 56.5,70.06 56.5,153 153,153 153,-153 56.5,-153
  Top Layer region: -56.5,70.06 -81.19,38.83 -90,0 -81.19,-38.83 -56.5,-70.06 -56.5,-70.06 -56.5,-70.06 -56.5,-153 -153,-153 -153,153 -56.5,153
  body extent -138,-138 138,138, height 411
SOIC127P600-8CN [mm] "SOIC, 8-Leads, Body 4.9x3.9mm, Pitch 1.27mm, IPC Medium Density"
  oval 1.5x0.6 smd: 1(-2.75,1.905) 2(-2.75,0.635) 3(-2.75,-0.635) 4(-2.75,-1.905) 5(2.75,-1.905) 6(2.75,-0.635) 7(2.75,0.635) 8(2.75,1.905)
  silkscreen extent -2.87,-2.5 1.6,2.88, body extent -3.01,-2.5 3.01,2.5, height 1.75
SOIC127P602-16BN [mm] "SOIC, 16-Leads, Body 9.9x3.9mm, Pitch 1.27mm, IPC Medium Density"
  oval 1.5x0.6 smd: 1(-2.75,4.445) 2(-2.75,3.175) 3(-2.75,1.905) 4(-2.75,0.635) 5(-2.75,-0.635) 6(-2.75,-1.905) 7(-2.75,-3.175) 8(-2.75,-4.445) 9(2.75,-4.445) 10(2.75,-3.175) 11(2.75,-1.905) 12(2.75,-0.635) 13(2.75,0.635) 14(2.75,1.905) 15(2.75,3.175) 16(2.75,4.445)
  silkscreen extent -2.87,-5 1.6,5.42, body extent -3.1,-5 3.1,5, height 1.75
SOT323-3AN [mm] "SOT323, 3-Leads, Body 2.0x1.3mm, Pitch 0.65mm, Lead Span 2.1mm, IPC Medium Density"
  rect 1.2x0.5 smd: 1(-0.95,0.65) 2(-0.95,-0.65) 3(0.95,0)
  silkscreen extent -1.07,-1.1 0.7,1.57, body extent -0.7,-1.1 0.7,1.1, height 1
V [mm] "Capacitor, SM Tantalum; Body 7.3 x 4.3 mm (LxW typ)"
  rect 2.6x2.4 smd: 1(-3.2,0) 2(3.2,0)
  silkscreen extent -4.58,-2.3 3.8,2.42, body extent -3.78,-2.16 3.52,2.14, height 4.15

## Part data
C1 C2 C3 C4 C5 C6 C7 C8 C9 C10 C12 C13 C14 C15 C16 C17 C18 C19 C27 C28 C31 C32 C34: "Capacitor"
C4_ATTEN1 C4_ATTEN2 C4_ATTEN3 C4_ATTEN4 C4_ATTEN5 C6_ATTEN1 C6_ATTEN2 C6_ATTEN3 C6_ATTEN4 C6_ATTEN5 C20 C21 C22 C23 C24 C25 C30 C40 C41 C60 C61: library part "Cap - SMT Small"
CONT: "Header, 8-Pin, Dual row"
D1: "+12 to +32 dBm RF Limiter"
DP1 DP2 DP3 DP4 DP5 DP6 DP7 DP8 DP9 DP10 DP11 DP12 DP13 DP14 DP15 DP16: "T 1 3/4 LED"
EMI_IN IN OSC OUT TONE: "SMA Connector - Bulkhead"
L1 L2: "Surface Mount 10 MHz to 10 GHz Bias Tee"
L3 L4: library part Inductor, "Inductor"
LC1 LC2 LC3 LC4 LC5 LC6 LC9 LC10: library part "MEM2012F - Signal Filter", "Signal Line 3-terminal Filters"
LC20: library part "LFCN-xxx Filter", "Ceramic Low Pass Filter"
LC21: library part "SXHP-xx Filter", "Integrated High Pass Filter"
N1: "SMT Noise Diode"
R1 R2: library part "RES Semi"
R1_ATTEN1 R1_ATTEN2 R1_ATTEN3 R1_ATTEN4 R1_ATTEN5 R2_ATTEN1 R2_ATTEN2 R2_ATTEN3 R2_ATTEN4 R2_ATTEN5 R3 R3_ATTEN1 R3_ATTEN2 R3_ATTEN3 R3_ATTEN4 R3_ATTEN5 R4_ATTEN1 R4_ATTEN2 R4_ATTEN3 R4_ATTEN4 R4_ATTEN5 R5_ATTEN1 R5_ATTEN2 R5_ATTEN3 R5_ATTEN4 R5_ATTEN5 R6_ATTEN1 R6_ATTEN2 R6_ATTEN3 R6_ATTEN4 R6_ATTEN5 R7_ATTEN1 R7_ATTEN2 R7_ATTEN3 R7_ATTEN4 R7_ATTEN5 R20 R21 R22 R23 R24 R25 R31 R32 R33 R34 R35 R37 R60 R61 RL1 RL2 RL3 RL4 RL5 RL6 RL7 RL8 RL9 RL10 RL11 RL12 RL13 RL14 RL15 RL16: "Semiconductor Resistor"
R36: "Resistor"
R39: library part RPot, "Potentiometer"
T2-A T2-B: "RF Coaxial PCB Connector, MMCX; Thru-Hole, Vertical Mount Plug,  50 Ohm Impedance"
U1: "Surface Mount Directional Coupler"
U1_ATTEN1 U1_ATTEN2 U1_ATTEN3 U1_ATTEN4 U1_ATTEN5: "31.5 dB, 0.5 dB Step 6 Bit, Serial Control Interface, Single Positive Supply Voltage"
U2: library part JSW6-33DR+, "SP6T RF Switch 50? 10 to 2700 MHz"
U3 U4: "Ultra Linear Low Noise Monolithic Amplifier"
U8: "SPDT RF Switch"
U9: "Dual Rail-to-Rail Input/Output, 30V, Wide Voltage Range, High Output Operational Amplifier"
U10: "8-Bit Shift Register with Output Latch"

## Free pads (board coordinates)
  round 200 hole 128.5: 0(1200,2250) 0(1200,2775) 0(1200,3200) 0(6300,2350) 0(6300,2850)
  round 250 hole 128.5: 0(1200,3800) 1(1200,1200) 1(6300,1200) 1(6300,3800)

## Via types
v1: diameter 40, hole 20, Top Layer to Gnd 2, tented both sides, 760 vias
v2: diameter 25, hole 15, Top Layer to Gnd 2, tented both sides, 345 vias
v3: diameter 25, hole 15, Top Layer to Gnd 2, 45 vias
v4: diameter 20, hole 10, Top Layer to Gnd 2, tented both sides, 4 vias
v5: diameter 22, hole 10, Top Layer to Gnd 2, tented bottom, 4 vias

## Nets (pads, with @x,y where several pads share a name; then routed paths per layer and width w, separated by ;. In a path a pad name is that pad's centre, name@x,y a point inside that pad or via, vN(x,y) a via of type N, cw(c..) or ccw(c..) an arc to the next point about the centre after c; other vN are vias at no path point)
3V3: C4_ATTEN1.2 C4_ATTEN2.2 C4_ATTEN3.2 C4_ATTEN4.2 C4_ATTEN5.2 C6_ATTEN1.2 C6_ATTEN2.2 C6_ATTEN3.2 C6_ATTEN4.2 C6_ATTEN5.2 C9.2 C10.2 C12.2 C13.2 C18.2 C20.2 C30.2 C40.1 CONT.5 CONT.6 L1.3 L2.3 R1_ATTEN1.2 R1_ATTEN2.2 R1_ATTEN3.2 R1_ATTEN4.2 R1_ATTEN5.2 R2_ATTEN1.2 R2_ATTEN2.2 R2_ATTEN3.2 R2_ATTEN4.2 R2_ATTEN5.2 R3_ATTEN1.2 R3_ATTEN2.2 R3_ATTEN3.2 R3_ATTEN4.2 R3_ATTEN5.2 R4_ATTEN1.2 R4_ATTEN2.2 R4_ATTEN3.2 R4_ATTEN4.2 R4_ATTEN5.2 R5_ATTEN1.2 R5_ATTEN2.2 R5_ATTEN3.2 R5_ATTEN4.2 R5_ATTEN5.2 R6_ATTEN1.2 R6_ATTEN2.2 R6_ATTEN3.2 R6_ATTEN4.2 R6_ATTEN5.2 R20.2 R31.2 RL9.1 U1_ATTEN1.6 U1_ATTEN1.9 U1_ATTEN1.13 U1_ATTEN2.6 U1_ATTEN2.9 U1_ATTEN2.13 U1_ATTEN3.6 U1_ATTEN3.9 U1_ATTEN3.13 U1_ATTEN4.6 U1_ATTEN4.9 U1_ATTEN4.13 U1_ATTEN5.6 U1_ATTEN5.9 U1_ATTEN5.13 U10.10 U10.16 | length 4973.9
  Top Layer w6: RL9.1@4580,1502.56 v1(4580,1575) ; v1(4735.83,1800) U10.10@4808.27,1800
  Top Layer w7: R31.2@1967.56,2700 C30.2@2012.44,2700 ; C30.2@2017.44,2700 v2(2017.44,2747.44) ; v2(2077.56,2552.56) R4_ATTEN4.2@2125,2552.56 R6_ATTEN4.2@2200,2552.56 R5_ATTEN4.2@2275,2552.56 ; v2(2125,3325) R4_ATTEN5.2@2125,3277.56 R6_ATTEN5.2@2200,3277.56 R5_ATTEN5.2@2275,3277.56 ; v2(2347.46,2122.23) C6_ATTEN4.2@2347.46,2169.67 ; v2(2347.46,2847.23) C6_ATTEN5.2@2347.46,2894.67 ; R1_ATTEN4.2@2425,2552.56 R3_ATTEN4.2@2500,2552.56 R2_ATTEN4.2@2575,2552.56 v2(2622.44,2552.56) ; R1_ATTEN5.2@2425,3277.56 R3_ATTEN5.2@2500,3277.56 R2_ATTEN5.2@2575,3277.56 v2(2575,3325) ; v2(2552.57,2122.23) C4_ATTEN4.2@2552.57,2169.67 ; v2(2552.57,2847.23) C4_ATTEN5.2@2552.57,2894.67 ; v2(3026.98,2357.89) R4_ATTEN1.2@3074.43,2357.89 R6_ATTEN1.2@3149.43,2357.89 R5_ATTEN1.2@3224.43,2357.89 ; v2(3027.56,1735.12) R4_ATTEN2.2@3075,1735.12 R6_ATTEN2.2@3150,1735.12 R5_ATTEN2.2@3225,1735.12 ; v2(3296.88,1927.56) C6_ATTEN1.2@3296.88,1975 ; v2(3297.46,1304.79) C6_ATTEN2.2@3297.46,1352.23 ; R1_ATTEN1.2@3374.43,2357.89 R3_ATTEN1.2@3449.43,2357.89 R2_ATTEN1.2@3524.43,2357.89 v2(3571.87,2357.89) ; R1_ATTEN2.2@3375,1735.12 R3_ATTEN2.2@3450,1735.12 R2_ATTEN2.2@3525,1735.12 v2(3525,1782.56) ; v2(3475,2675) R20.2@3522.44,2675 3522.44,2735 C20.2@3522.56,2735 ; v2(3502,1927.56) C4_ATTEN1.2@3502,1975 ; v2(3502.57,1304.79) C4_ATTEN2.2@3502.57,1352.23 ; v2(4769,2855.77) R4_ATTEN3.2@4769,2808.33 R6_ATTEN3.2@4824,2808.33 R5_ATTEN3.2@4879,2808.33 ; v2(4951.46,2378) C6_ATTEN3.2@4951.46,2425.44 ; R1_ATTEN3.2@5029,2808.33 R2_ATTEN3.2@5139,2808.33 ; R1_ATTEN3.2@5039.98,2808.33 v2(5039.98,2855.77) ; v2(5156.57,2378) C4_ATTEN3.2@5156.57,2425.44
  Top Layer w8: U1_ATTEN4.6@2310.63,2252.36 2310.63,2206.5 2347.46,2169.67 2369.68,2191.9 U1_ATTEN4.9@2369.68,2252.36 ; U1_ATTEN5.6@2310.63,2977.36 2310.63,2931.5 2347.46,2894.67 2369.68,2916.9 U1_ATTEN5.9@2369.68,2977.36 ; U1_ATTEN4.13@2422.64,2325 2444.68,2325 2552.57,2217.11 C4_ATTEN4.2@2552.57,2169.67 ; U1_ATTEN5.13@2422.64,3050 2444.68,3050 2552.57,2942.11 C4_ATTEN5.2@2552.57,2894.67 ; U1_ATTEN1.6@3260.06,2057.69 3260.06,2011.83 C6_ATTEN1.2@3296.88,1975 3319.11,1997.23 U1_ATTEN1.9@3319.11,2057.69 ; U1_ATTEN2.6@3260.63,1434.92 3260.63,1389.05 C6_ATTEN2.2@3297.46,1352.23 3319.69,1374.46 U1_ATTEN2.9@3319.69,1434.92 ; U1_ATTEN1.13@3372.06,2130.33 3394.11,2130.33 3502,2022.44 C4_ATTEN1.2@3502,1975 ; U1_ATTEN2.13@3372.64,1507.56 3394.69,1507.56 3502.57,1399.67 C4_ATTEN2.2@3502.57,1352.23 3502.57,1377.62 ; U1_ATTEN3.6@4914.63,2508.13 4914.63,2462.27 C6_ATTEN3.2@4951.46,2425.44 4973.69,2447.67 U1_ATTEN3.9@4973.69,2508.13 ; U1_ATTEN3.13@5026.64,2580.77 5048.69,2580.77 5156.57,2472.88 C4_ATTEN3.2@5156.57,2425.44
  Top Layer w10: C18.2@4777.56,2200 4777.56,2117.44 4795,2100 U10.16@4808.27,2100 ; U10.16@4825,2100 v1(4825,2154.88)
  other v2: 4370,2775 4400,2775 4430,2775 5670,2775 5700,2775 5730,2775 5599.88,3440 5599.88,3470 5599.88,3500 5599.88,3530 5599.88,3560
15V: C34.2 C41.1 CONT.3 CONT.4 R35.2 RL10.1 U9.8 | length 5653.1
  Top Layer w10: CONT.4@5800,1390 5843.18,1346.82 ccw(c5920,1423.64) 5920,1315 ccw(c5920,1575) 6180,1575 RL10.1@6180,1822.44
  Top Layer w15: R35.2@1603.15,1150 1865.69,1150 cw(c1865.69,1086.71) C41.1@1910.44,1131.46 ; C34.2@1735,1252.56 U9.8@1735,1316.73 cw(c1735,1219.75) 1803.58,1288.33 1875.09,1216.82 cw(c1789.73,1131.46) C41.1@1910.44,1131.46 ; CONT.3@5800,1490 CONT.4@5800,1390 cw(c5470,1390) 5470,1060 2032.07,1060 cw(c2032.07,1181.11) 1946.43,1095.47 C41.1@1910.44,1131.46
ATTEN_1_LATCH: LC2.1 RL14.1 U1_ATTEN1.5 | length 4296.3
  Top Layer w6: U1_ATTEN1.5@3236.79,2090.96 3236.79,1890 3291.79,1835 3545,1835 3590,1790 v2(3590,1730) ; v2(3590,1405) ccw(c3755,1405) 3755,1240 4580,1240 ccw(c4580,1545) 4885,1545 4885,1609.79 cw(c5175.21,1609.79) 4970,1815 5052.02,1897.02 cw(c5300.63,1648.42) 5300.63,2000 5586.2,2000 cw(c5586.2,1500) 5939.75,1853.55 LC2.1@6000,1793.31 RL14.1@6000,2097.44
  Interconnects w6: v2(3590,1405) v2(3590,1730)
ATTEN_2_LATCH: LC4.1 RL13.1 U1_ATTEN2.5 | length 3642.7
  Top Layer w6: U1_ATTEN2.5@3237.36,1468.19 3237.36,1372.64 ccw(c3400,1372.64) 3248.05,1314.66 ccw(c3400,1372.64) 3400,1210 4585,1210 ccw(c4585,1535) 4910,1535 4910,1621.01 cw(c5148.99,1621.01) 4979.93,1789.93 cw(c5148.99,1621.01) 4980,1790 5069.1,1879.1 ; 5069.13,1879.13 cw(c5300.63,1647.56) 5300.63,1975 5575.89,1975 cw(c5575.89,1516.63) v2(5900,1840.75) LC4.1@5900,1793.31
  Top Layer w7: v2(5900,2050) RL13.1@5900,2097.44
  Interconnects w6: v2(5900,1840.75) v2(5900,2050)
ATTEN_3_LATCH: LC10.1 RL16.1 U1_ATTEN3.5 | length 1018.3
  Top Layer w6: U1_ATTEN3.5@4881.36,2541.4 4881.36,2475 ccw(c5162.29,2475) 4963.61,2276.39 ccw(c5162.29,2475) 4963.64,2276.36 4995,2245 ccw(c5224.35,2474.35) 4995.08,2244.92 ccw(c5224.35,2474.35) 5224.35,2150 RL16.1@5297.44,2150 5300.63,2146.81 v2(5300.63,2090) ; LC10.1@5300.63,1793.86 v2(5300.63,1841.3)
  Top Layer w7: LC10.1@5299.49,1795 LC10.1@5300.63,1793.86
  Interconnects w7: v2(5300.63,1841.3) v2(5300.63,2090)
ATTEN_4_LATCH: LC3.1 RL12.1 U1_ATTEN4.5 | length 5287.5
  Top Layer w6: v2@2277.36,2115.44 U1_ATTEN4.5@2277.36,2285.63 ; v2(3190,1300) ccw(c3305,1300) 3305,1185 4595,1185 ccw(c4595,1525) 4935,1525 4935,1618.08 cw(c5156.92,1618.08) 5000,1775 5086.61,1861.61 ; 5086.63,1861.63 cw(c5300,1648.22) 5300,1950 5538.2,1950 cw(c5538.2,1578.87) v2(5800.63,1841.3) LC3.1@5800.63,1793.86
  Top Layer w7: v2(5800,2050) RL12.1@5800,2097.44
  Interconnects w6: v2(2277.14,2115.44) ccw(c2359.99,2115.44) 2301.4,2056.86 ccw(c2366.24,2121.69) 2304.84,2053.59 ccw(c2366.24,2121.69) 2366.24,2030 3100,2030 cw(c3100,1940) 3190,1940 v2(3190,1300)
  Interconnects w7: v2(5800,2050) 5800,1841.93 v2(5800.63,1841.3)
ATTEN_5_LATCH: LC1.1 RL15.1 U1_ATTEN5.5 | length 5975.9
  Top Layer w6: v2(2277.36,2692.64) U1_ATTEN5.5@2277.36,3010.63 ; v2(3161.44,1270) ccw(c3271.44,1270) 3271.44,1160 4605,1160 ccw(c4605,1515) 4960,1515 4960,1629.29 cw(c5130.71,1629.29) 5009.96,1749.96 cw(c5130.71,1629.29) 5010,1750 5103.68,1843.68 cw(c5300,1647.37) 5103.74,1843.74 cw(c5300,1647.37) 5300,1925 5498.56,1925 cw(c5498.56,1639.23) v2(5700.63,1841.3) LC1.1@5700.63,1793.86
  Top Layer w7: v2(5700,2050) RL15.1@5700,2097.44
  Interconnects w6: v2(2277.36,2692.64) ccw(c2367.56,2602.44) 2240,2602.44 2240,2125 ccw(c2355,2125) 2355,2010 3076.44,2010 cw(c3076.44,1925) 3161.44,1925 v2(3161.44,1270) ; v2(5700,2050) 5700.63,2049.37 v2(5700.63,1841.3)
CLK: LC9.1 U1_ATTEN1.4 U1_ATTEN2.4 U1_ATTEN3.4 U1_ATTEN4.4 U1_ATTEN5.4 U10.11 | length 7432.6
  Top Layer w6: v2(2218.7,2075.94) ccw(c2155.17,2139.47) 2245.02,2139.47 2245.02,2294.67 2255.66,2305.32 U1_ATTEN4.4@2277.36,2305.32 ; v2(2245,2715) 2245.02,3019.67 2255.66,3030.32 U1_ATTEN5.4@2277.36,3030.32 ; v2(3129.44,1860) 3169.69,1900.25 ccw(c3109.94,1960) 3194.44,1960 3194.44,2090 cw(c3215.09,2090) 3215.09,2110.65 U1_ATTEN1.4@3226.79,2110.65 ; U1_ATTEN2.4@3227.36,1487.87 3217.89,1487.87 ccw(c3217.89,1465) 3195.02,1465 3195.02,1350.02 3147.23,1302.23 v2(3130.02,1302.23) 3130.02,1280 ccw(c3275.02,1280) 3275.02,1135 4615,1135 ccw(c4615,1505) 4985,1505 4985,1616.36 cw(c5138.64,1616.36) v2(5030,1725) ; U10.11@4808.27,1850 4813.27,1845 v2(4910,1845) 4910,2249.64 ccw(c4824.64,2249.64) 4885.04,2309.96 ccw(c4824.64,2249.64) 4885,2310 cw(c4971.87,2396.87) 4884.95,2310.05 cw(c4971.87,2396.87) 4849.02,2396.87 4849.02,2545.1 cw(c4865,2545.1) 4850.59,2552.01 cw(c4865,2545.1) 4858.09,2559.52 cw(c4865,2545.1) 4865,2561.09 U1_ATTEN3.4@4881.36,2561.09 ; v2(5030,1725) 5137.38,1832.38 cw(c5300.63,1669.13) 5300.63,1900 5394.49,1900 cw(c5394.49,1793.86) LC9.1@5500.63,1793.86
  Interconnects w6: v2(2245,2715) ccw(c2308.49,2651.51) 2218.7,2651.51 v2(2218.7,2075.94) ccw(c2304.64,2075.94) 2304.64,1990 3045,1990 cw(c3045,1905) 3130,1905 v2@3130,1860 ; v2@3129.44,1302.23 v2(3129.44,1860) ; v2(4910,1845) v2(5030,1725)
CLK_RAW: CONT.12 LC9.3 | length 392.3
  Top Layer w6: 5374.72,1415.28 cw(c5434.5,1475) 5350,1475 5350,1514.19 cw(c5452.43,1514.19) 5379.98,1586.6 LC9.3@5500.63,1707.24 ; 5374.75,1415.25 CONT.12@5400,1390
D1: RL7.1 U10.6 | length 446
  Top Layer w7: RL7.1@4375,1502.56 4400.14,1527.7 ccw(c4122.83,1805) 4515,1805 cw(c4560,1805) 4560,1850 U10.6@4591.73,1850
D2: RL8.1 U10.7 | length 360.4
  Top Layer w7: RL8.1@4450,1502.56 ccw(c4232.72,1719.84) 4540,1719.84 4540,1770 cw(c4570,1770) 4570,1800 U10.7@4591.73,1800
DAT: LC6.1 R7_ATTEN1.2 R7_ATTEN2.2 R7_ATTEN3.2 R7_ATTEN4.2 R7_ATTEN5.2 U10.14 | length 6395.6
  Top Layer w6: v2(2180,2090) 2180,2108.72 cw(c2225.2,2108.72) 2193.24,2140.68 R7_ATTEN4.2@2200,2147.44 ; v2(2200,2715) R7_ATTEN5.2@2200,2872.44 ; v2@3099.44,1897.44 cw(c3149.44,1897.44) R7_ATTEN1.2@3149.44,1947.44 ; R7_ATTEN2.2@3150.02,1374.67 3142.46,1374.67 ccw(c3142.46,1332.23) v2(3100.02,1332.23) 3100.02,1285 ccw(c3275.02,1285) 3275.02,1110 4620,1110 ccw(c4620,1500) 5010,1500 cw(c5335.92,1500) 5105.46,1730.46 v2(5155,1780) 5214.64,1839.64 cw(c5300,1754.29) 5300,1875 5319.49,1875 cw(c5319.49,1793.86) LC6.1@5400.63,1793.86 ; R7_ATTEN3.2@4804.02,2397.88 4804.02,2374.8 ccw(c4909.8,2374.8) 4834.96,2300.04 ccw(c4909.8,2374.8) 4835,2300 cw(c4750.5,2215.5) 4870,2215.5 v2(4870,2000) U10.14@4808.27,2000
  Interconnects w6: v2(2200,2715) 2200,2179.14 cw(c2165.86,2179.14) 2190,2155 ccw(c2214.14,2130.86) 2180,2130.86 v2(2180,2090) 2180,2075 ccw(c2285,2075) 2285,1970 3019.44,1970 cw(c3019.44,1890) v2(3099.44,1890) 3099.44,1317.23 ; v2(4870,2000) cw(c4870,1843.08) 4980.93,1954.07 v2(5155,1780)